# EAGLE board working (EAGLE 9.6.2)
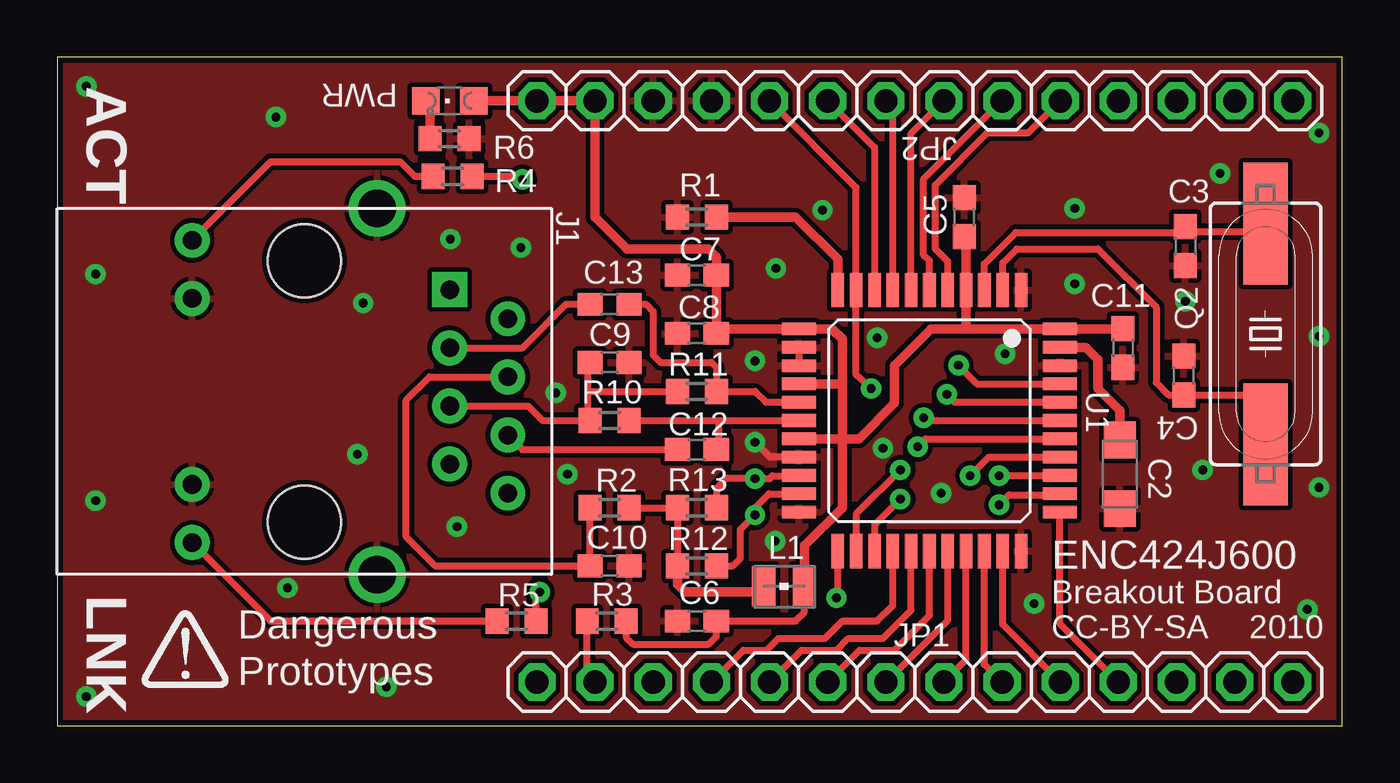
[diagram p0: board, top side]
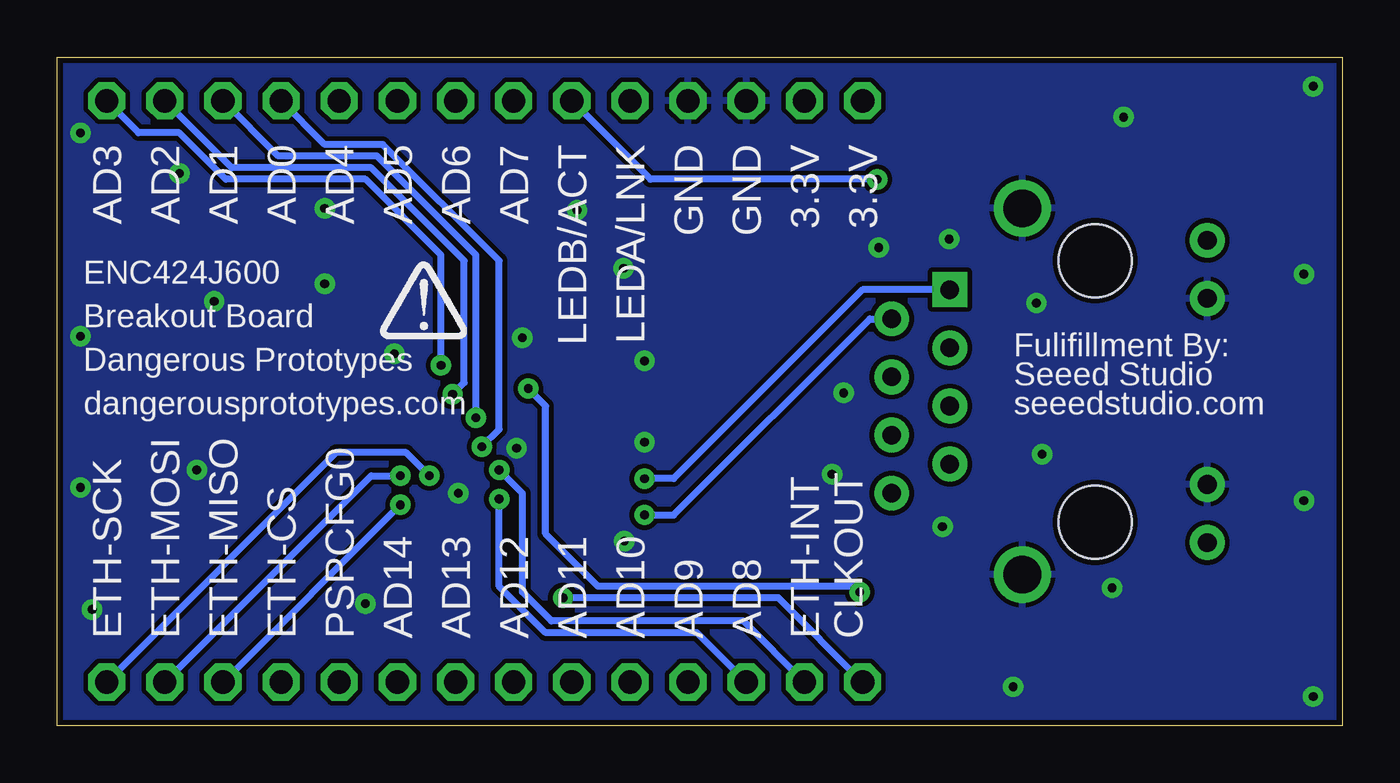
[diagram p1: board, bottom side, seen from below]

Size 56.13 x 29.21 mm. Coordinates in mm from the lower left corner, seen from the top.
Outline: 0,0 56.13,0 56.13,29.21 0,29.21 0,0
Copper layers (1*16): Top 0.035mm / dielectric 1.5mm / Bottom 0.035mm
Design rules "SparkFun *": minimum track width 8mil, minimum drill 15mil, track to track 8mil, track to pad 8mil, pad to pad 8mil, via to via 8mil, smd to smd 8mil, copper to edge 10mil, drill to drill 8mil, minimum pad ring 12mil, minimum via ring 10mil, stop-mask expansion 4mil, vias tented up to drill 25mil, thermal gap 8mil

## Footprints (pad centres in the part's own frame; a part is rotated, then mirrored left to right if it is on the bottom)
SMC_A = smd 1.6 x 1.4: + -1.5,0; - 1.5,0
C0603 = smd 1.1 x 1: 1 -0.85,0; 2 0.85,0
HR911105A = drill 0.813 pad 1.524 square: 1 4.445,-6.35 | drill 0.813 pad 1.524: 2 3.175,-8.89; 3 1.905,-6.35; 4 0.635,-8.89; 5 -0.635,-6.35; 6 -1.905,-8.89; 7 -3.175,-6.35; 8 -4.445,-8.89; 9 6.604,4.902; 10 4.064,4.902; 11 -4.064,4.902; 12 -6.604,4.902 | drill 1.651 pad 2.159: 13 8.001,-3.175; 14 -8.001,-3.175 | hole 3.2: 5.715,0; -5.715,0
1X14 = drill 1.016 octagon: 1 -16.51,0; 2 -13.97,0; 3 -11.43,0; 4 -8.89,0; 5 -6.35,0; 6 -3.81,0; 7 -1.27,0; 8 1.27,0; 9 3.81,0; 10 6.35,0; 11 8.89,0; 12 11.43,0; 13 13.97,0; 14 16.51,0
WE-KI_0805_B = smd 1.02 x 1.78: 1 -0.89,0; 2 0.89,0
LED-805 = smd 1.2 x 1.2: A 0,-1.05; C 0,1.05
HC49UP = smd 5.334 x 1.93: 1 -4.826,0; 2 4.826,0
R0603 = smd 1 x 1.1: 1 -0.85,0; 2 0.85,0
TQFP44 = smd 0.55 x 1.5: P1 -4,-5.7; P2 -3.2,-5.7; P3 -2.4,-5.7; P4 -1.6,-5.7; P5 -0.8,-5.7; P6 0,-5.7; P7 0.8,-5.7; P8 1.6,-5.7; P9 2.4,-5.7; P10 3.2,-5.7; P11 4,-5.7; P23 4,5.7; P24 3.2,5.7; P25 2.4,5.7; P26 1.6,5.7; P27 0.8,5.7; P28 0,5.7; P29 -0.8,5.7; P30 -1.6,5.7; P31 -2.4,5.7; P32 -3.2,5.7; P33 -4,5.7 | smd 1.5 x 0.55: P12 5.7,-4; P13 5.7,-3.2; P14 5.7,-2.4; P15 5.7,-1.6; P16 5.7,-0.8; P17 5.7,0; P18 5.7,0.8; P19 5.7,1.6; P20 5.7,2.4; P21 5.7,3.2; P22 5.7,4; P34 -5.7,4; P35 -5.7,3.2; P36 -5.7,2.4; P37 -5.7,1.6; P38 -5.7,0.8; P39 -5.7,0; P40 -5.7,-0.8; P41 -5.7,-1.6; P42 -5.7,-2.4; P43 -5.7,-3.2; P44 -5.7,-4

## Placement (x,y rotation side)
C2  10uF  [SMC_A]  46.42,10.99 270 top
C3  27pf  [C0603]  49.28,20.95 270 top
C4  27pf  [C0603]  49.21,15.3 90 top
C5  0.1uF  [C0603]  39.62,22.23 90 top
C6  0.1uF  [C0603]  27.94,4.57 180 top
C7  0.1uF  [C0603]  27.94,19.68 180 top
C8  0.1uF  [C0603]  27.94,17.14 180 top
C9  0.01uF  [C0603]  24.13,15.88 0 top
C10  0.01uF  [C0603]  24.13,6.99 0 top
C11  0.1uF  [C0603]  46.55,16.51 270 top
C12  6.8nF  [C0603]  27.94,12.06 180 top
C13  6.8nF  [C0603]  24.13,18.41 180 top
J1  HR911105A  [HR911105A]  10.79,14.61 90 top
JP1  [1X14]  37.47,1.91 0 top
JP2  [1X14]  37.47,27.3 0 top
L1  [WE-KI_0805_B]  31.75,6.1 180 top
PWR  [LED-805]  17.14,27.3 90 top
Q2  25Mhz  [HC49UP]  52.78,17.12 270 top
R1  12.4K 1%  [R0603]  27.94,22.23 180 top
R2  10R, 1/12W, 1%  [R0603]  24.13,9.53 180 top
R3  100K  [R0603]  24,4.57 180 top
R4  1K1  [R0603]  17.27,24 180 top
R5  1K1  [R0603]  20.07,4.57 180 top
R6  1k1  [R0603]  17.14,25.65 180 top
R10  49R9 1%  [R0603]  24.13,13.34 180 top
R11  49R9 1%  [R0603]  27.94,14.61 180 top
R12  49R9 1%  [R0603]  27.94,6.99 180 top
R13  49R9 1%  [R0603]  27.94,9.53 180 top
U1  ENC424J600  [TQFP44]  38.1,13.34 180 top
U$1  [DP_LOGO]  5.59,2.29 0 top
U$2  [DP_LOGO]  40.13,17.53 0 bottom

## Library data of the parts
C2-C13 R1-R6 R10-R13 = rcl
J1 = CONNECTER
JP1 JP2 = pinhead - Copy
L1 = wuerth-elektronik
PWR U1 U$1 U$2 = dp_devices
Q2 = crystal

## Nets
3V3: C5.1 C6.1 C7.1 C8.1 C11.1 JP2.1 JP2.2 L1.1 PWR.A R3.1 U1.P4 U1.P12 U1.P15 U1.P18 U1.P44
ACTIVITY: J1.9 R4.2
AD0: JP2.11 U1.P38
AD1: JP2.12 U1.P39
AD2: JP2.13 U1.P40
AD3: JP2.14 U1.P41
AD4: JP2.10 U1.P5
AD5: JP2.9 U1.P6
AD6: JP2.8 U1.P7
AD7: JP2.7 U1.P8
AD8: JP1.3 U1.P25
AD9: JP1.4 U1.P26
AD10: JP1.5 U1.P27
AD11: JP1.6 U1.P28
AD12: JP1.7 U1.P29
AD13: JP1.8 U1.P30
AD14: JP1.9 U1.P31
CCT: L1.2 R2.1 R12.2 R13.2
CLKOUT: JP1.1 U1.P23
DSFGDF: C12.1 R10.1 U1.P17
DSGDFSG: C13.1 R11.1 U1.P16
ETH-CS: JP1.11 U1.P34
ETH-INT: JP1.2 R3.2 U1.P24
ETH-MISO: JP1.12 U1.P35
ETH-MOSI: JP1.13 U1.P36
ETH-SCK: JP1.14 U1.P37
GND: C2.- C3.2 C4.2 C5.2 C6.2 C7.2 C8.2 C9.2 C10.2 C11.2 J1.10 J1.11 J1.13 J1.14 JP2.3 JP2.4 R1.2 R6.1 U1.P1 U1.P13 U1.P14 U1.P19 U1.P22 U1.P33 U1.P42
LED_A: JP2.5 R5.1 U1.P10
LED_B: JP2.6 R4.1 U1.P9
LINK: J1.12 R5.2
N$1: C2.+ U1.P43
N$2: R1.1 U1.P11
N$3: PWR.C R6.2
N$4: C3.1 Q2.1 U1.P3
N$8: C4.1 Q2.2 U1.P2
PSPCFG0: JP1.10 U1.P32
RD+: C13.2 J1.3
RD-: C12.2 J1.6
RD-CT: C9.1 J1.5 R10.2 R11.2
TD+: J1.1 R13.1 U1.P20
TD-: J1.2 R12.1 U1.P21
TD-CT: C10.1 J1.4 R2.2

## Tracks (layer width: path | path; a pad name or v marks a point on that pad's centre or on a via)
3V3
  Top 0.305: U1.P12 32.39,17.35 | L1.1 32.64,4.95 32.26,4.57 C6.1 28.79,3.9 28.45,3.56 25.15,3.56 24.85,3.85 R3.1
  Top 0.406: 34.29,12.54 U1.P18 | 34.29,12.54 35.01,12.54 36.58,14.1 36.58,15.75 38.16,17.34 39.76,17.34 | 34.29,14.86 34.29,16.89 33.85,17.34 U1.P12 28.98,17.34 C8.1 C7.1 28.79,20.49 28.45,20.83 24.89,20.83 23.5,22.23 JP2.2 JP2.1 PWR.A | U1.P15 34.21,14.94 34.29,14.86 | 39.76,17.34 U1.P44 46.52,17.34 C11.1 | 39.76,17.34 39.7,17.4 U1.P4 39.7,21.3 C5.1 | 34.29,12.54 34.29,9.53 32.64,7.88 L1.1 | 34.29,12.54 34.29,14.86
ACTIVITY
  Top 0.305: R4.2 15.62,24 14.99,24.64 9.32,24.64 J1.9
AD0  (via drill 0.38)
  Top 0.305: U1.P38 37.94,12.54 v37.59,12.19
  Bottom 0.305: JP2.11 44.45,25.4 41.91,25.4 36.83,20.32 36.83,12.95 v37.59,12.19
AD1  (via drill 0.38)
  Top 0.305: U1.P39 37.97,13.34 v37.85,13.46
  Bottom 0.305: JP2.12 46.48,24.89 42.16,24.89 37.85,20.57 v37.85,13.46
AD2  (via drill 0.38)
  Top 0.305: U1.P40 39.2,14.13 v38.86,14.48
  Bottom 0.305: JP2.13 48.51,24.38 42.42,24.38 38.35,20.32 38.35,14.99 v38.86,14.48
AD3  (via drill 0.38)
  Top 0.305: U1.P41 40.18,14.94 v39.37,15.75
  Bottom 0.305: JP2.14 52.58,25.91 50.8,25.91 48.77,23.88 42.67,23.88 39.37,20.57 v39.37,15.75
AD4
  Top 0.305: U1.P5 38.9,20.28 38.35,20.83 38.35,23.62 40.64,25.91 42.42,25.91 JP2.10
AD5
  Top 0.305: U1.P6 38.1,20.32 37.85,20.57 37.85,23.88 JP2.9
AD6
  Top 0.305: U1.P7 37.3,25.87 JP2.8
AD7
  Top 0.305: U1.P8 36.5,27 JP2.7
AD8  (via drill 0.38)
  Top 0.305: U1.P25 35.7,8.78 v36.83,9.91
  Bottom 0.305: v36.83,9.91 36.83,6.1 34.8,4.06 28.19,4.06 JP1.3
AD9
  Top 0.305: JP1.4 29.97,3.3 30.99,3.3 31.5,3.81 33.53,3.81 34.29,4.57 35.81,4.57 36.5,5.26 U1.P26
AD10
  Top 0.305: U1.P27 37.3,5.04 36.07,3.81 34.54,3.81 34.04,3.3 32.51,3.3 JP1.5
AD11
  Top 0.305: U1.P28 38.1,4.83 36.58,3.3 35.05,3.3 JP1.6
AD12
  Top 0.305: U1.P29 38.9,4.61 JP1.7
AD13
  Top 0.305: U1.P30 39.7,2.87 JP1.8
AD14
  Top 0.305: U1.P31 40.5,2.68 JP1.9
CCT
  Top 0.305: R2.1 R13.2 R12.2
  Top 0.406: L1.2 31.11,5.97 30.99,5.84 27.43,5.84 27.09,6.18 R12.2
CLKOUT  (via drill 0.38)
  Top 0.305: U1.P23 34.1,5.91 v34.04,5.59
  Bottom 0.305: v34.04,5.59 24.64,5.59 JP1.1
DSFGDF
  Top 0.305: R10.1 28.89,13.34 | 28.89,13.34 U1.P17 | 28.89,13.34 28.89,12.17 C12.1
DSGDFSG
  Top 0.305: U1.P16 30.95,14.13 30.48,14.61 R11.1 28.79,15.66 28.57,15.88 26.35,15.88 26.04,16.19 26.04,18.1 25.72,18.41 C13.1
ETH-CS
  Top 0.305: U1.P34 43.8,4.46 JP1.11
ETH-INT  (via drill 0.38)
  Top 0.305: U1.P24 34.9,9.25 v36.83,11.18 | R3.2 23.15,2.25 JP1.2
  Bottom 0.305: v36.83,11.18 35.81,10.16 35.81,5.84 34.54,4.57 26.16,4.57 JP1.2
ETH-MISO  (via drill 0.38)
  Top 0.305: U1.P35 43.85,10.09 41.58,10.09 v41.15,9.65
  Bottom 0.305: JP1.12 v41.15,9.65
ETH-MOSI  (via drill 0.38)
  Top 0.305: U1.P36 41.16,10.94 v41.15,10.92
  Bottom 0.305: v41.15,10.92 42.42,10.92 JP1.13
ETH-SCK  (via drill 0.38)
  Top 0.305: U1.P37 40.69,11.73 v39.88,10.92
  Bottom 0.305: v39.88,10.92 40.89,11.94 43.94,11.94 JP1.14
GND  (via drill 0.38)
  Top 0.305: U1.P19 31.13,11.73 v30.48,12.38 | U1.P13 32.4,15.89 32.38,15.88
  other vias: 20.26,20.89 30.48,15.94 33.43,22.53 31.37,8.06 21.78,14.54 17.46,8.7 22.29,10.99 31.39,19.99 49.28,18.54 55.12,17.02 54.61,5.08 1.27,1.27 1.27,27.94 50.8,24.13 44.45,19.3 41.4,16.26 38.61,10.16 42.67,5.33 44.45,22.61 55.12,25.91 50.04,11.18 55.12,10.41 9.55,26.59 17.17,21.26 10.06,6.02 14.38,1.7 13.36,18.47 13.11,11.86 1.68,9.83 1.68,19.74 35.81,16.95 36.07,12.13
  pour Top: 0,29.21 55.88,29.21 55.88,0 0,0
  pour Bottom: 0,29.21 55.88,29.21 55.88,0 0,0
LED_A  (via drill 0.38)
  Top 0.305: JP2.5 34.9,23.52 U1.P10 34.9,15.34 v35.56,14.73 | R5.1 20.92,5.68 v21.08,5.84
  Bottom 0.305: v21.08,5.84 21.34,6.1 32.51,6.1 34.8,8.38 34.8,13.97 v35.56,14.73
LED_B  (via drill 0.38)
  Top 0.305: U1.P9 35.7,25.26 JP2.6 | R4.1 20.19,24 v20.32,23.88
  Bottom 0.305: v20.32,23.88 30.23,23.88 JP2.6
LINK
  Top 0.305: R5.2 9.32,4.57 J1.12
N$1
  Top 0.406: C2.+ 46.42,13.78 45.47,14.73 45.47,16 44.93,16.54 U1.P43
N$2
  Top 0.406: U1.P11 34.1,20.38 32.26,22.23 R1.1
N$3
  Top 0.406: R6.2 16.3,27.11 PWR.C
N$4
  Top 0.305: U1.P3 40.5,20.18 41.87,21.55 49.02,21.55 C3.1 49.49,21.59 52.58,21.59 52.78,21.79 Q2.1
N$8
  Top 0.305: U1.P2 41.3,20.22 41.91,20.83 45.47,20.83 48.01,18.29 48.01,14.99 48.54,14.45 C4.1 52.35,14.45 52.58,14.22 52.58,12.5 Q2.2
PSPCFG0
  Top 0.305: U1.P32 41.3,4.42 JP1.10
RD+
  Top 0.305: C13.2 22.23,18.41 20.32,16.51 J1.3
RD-
  Top 0.305: C12.2 20.32,12.06 J1.6
RD-CT
  Top 0.305: 23.18,14.61 R11.2 | C9.1 23.18,15.88 23.18,14.61 | 23.18,14.61 23.18,13.34 R10.2 21.21,13.34 20.57,13.97 J1.5
TD+  (via drill 0.38)
  Top 0.305: U1.P20 32.39,10.92 31.24,10.92 31.11,10.79 v30.48,10.79 29.21,10.79 28.79,10.38 R13.1
  Bottom 0.305: v30.48,10.79 29.21,10.79 20.95,19.05 J1.1
TD-  (via drill 0.38)
  Top 0.305: U1.P21 | U1.P21 31.09,10.13 30.48,9.53 v30.48,9.21 29.84,8.57 29.84,7.3 29.53,6.99 R12.1
  Bottom 0.305: v30.48,9.21 29.21,9.21 20.64,17.78 J1.2
TD-CT
  Top 0.305: R2.2 C10.1 16.51,6.99 15.24,8.26 15.24,14.22 16.26,15.24 J1.4

## Text on the board
tNames: ACT | ENC424J600 | LNK | Breakout Board | Dangerous | CC-BY-SA | 2010 | Prototypes
bNames: 3.3V | 3.3V | GND | GND | LEDA/LNK | LEDB/ACT | AD7 | AD6 | AD5 | AD4 | AD0 | AD1 | AD2 | AD3 | ENC424J600 | Breakout Board | Fulifillment By: | Seeed Studio | Dangerous Prototypes | seeedstudio.com | dangerousprototypes.com | CLKOUT | ETH-INT | AD8 | AD9 | AD10 | AD11 | AD12 | AD13 | AD14 | PSPCFG0 | ETH-CS | ETH-MISO | ETH-MOSI | ETH-SCK